# Altium PCB SIRA_Rev1.PcbDoc
Units mil, origin at the board's own origin, x right, y up, seen from the top; angles counter-clockwise.
Board outline 11445.03 x 5305.02 mil, 2 copper layers (Top Layer, Bottom Layer); 30 components, 83 nets, 179 pads, 0 vias.
Unrouted connection lines stored in the file: 2.
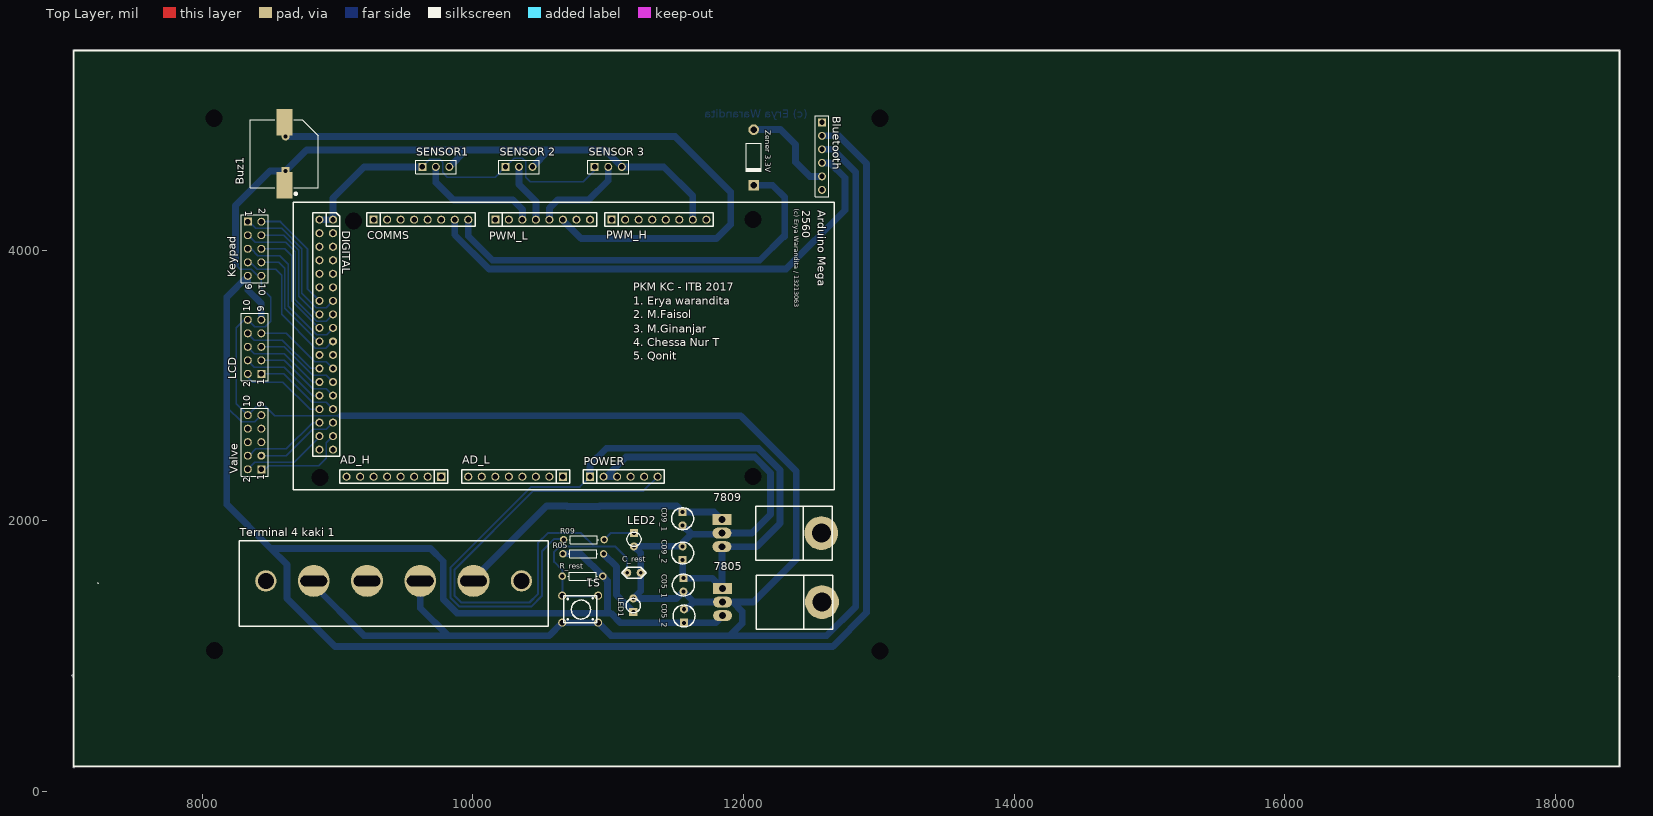
[diagram p0: Top Layer view]
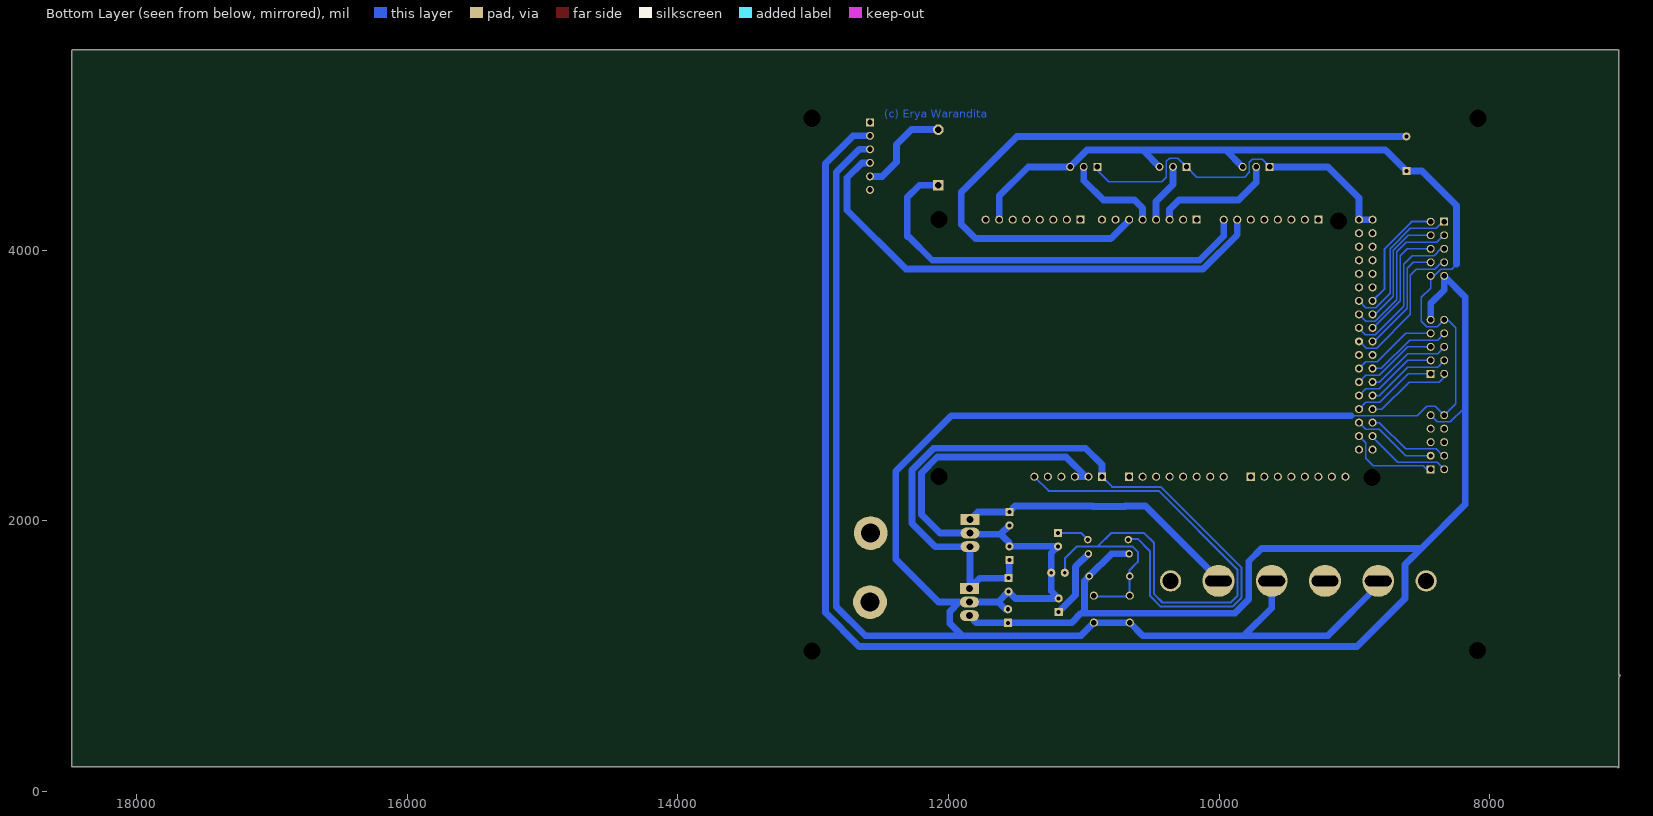
[diagram p1: Bottom Layer view, seen from below]

## Layer stack, top to bottom
Top Solder: solder mask 0.4, Solder Resist, Dk 3.5
Top Layer: signal copper 1.4
Dielectric 1: dielectric 12.6, FR-4, Dk 4.8
Bottom Layer: signal copper 1.4
Bottom Solder: solder mask 0.4, Solder Resist, Dk 3.5

## Board outline
7041.45,846.45 ccw(c7045,850) 7044.98,844.99 7044.98,180 ccw(c7050,180) 7053.56,176.47 7053.55,176.45 7057.08,179.99 18475,179.99 ccw(c18475,185) 18480.01,185 18480.01,5475 ccw(c18475,5475) 18475,5480.02 7050,5480.02 ccw(c7050,5475) 7044.98,5475 7044.98,857.11 7043.55,858.55 ccw(c7040,855) 7036.45,851.45

## Design rules (kind name [scope] priority, off if disabled: settings)
Clearance [All] p1: gap=15
PolygonConnect [All] p1: connectstyle=Relief reliefconductorwidth=10 reliefentries=4 polygonreliefangle="90 Angle" airgapwidth=10
RoomDefinition SIRA_Rev1 [InComponentClass('SIRA_Rev1')] p1: confinementstyle=ConfineIn formatcopy=TRUE lockcomponents=FALSE outline 7990,930 13155,930 13155,5090 7990,5090
RoutingVias [All] p1: holewidth=28 width=50 viastyle="Through Hole" minholewidth=28 minwidth=50 maxholewidth=28 maxwidth=50
SolderMaskExpansion [All] p1: expansion=4
Width [All] p1: maxlimit=50 minlimit=10 preferedwidth=15
30 further rules are at their usual default settings.

## Classes and differential pairs
component class SIRA_Rev1: 7805 7809 AD_H AD_L Buz1 C05_1 C05_2 C09_1 C09_2 C_rest COMMS DIGITAL Keypad LCD LED1 LED2 POWER PWM_H PWM_L R05 R09 R_rest S1 SENSOR1 "SENSOR 2" "SENSOR 3" "Terminal 4 kaki 1" Valve

## Components (designator, comment, footprint, x,y, rotation, side; value= is the part's Value field where it differs from the comment)
7805 "78XX/79XX" 78XX/79XX 12085,1880 r0 top
7809 "78XX/79XX" 78XX/79XX 12080,2390 r0 top
AD_H "AD_H" "Header 8x1 8.5mm" 9765,2325 r180 top
AD_L "AD_L" "Header 8x1 8.5mm" 10665,2325 r180 top
Bluetooth "Comment" HDR1X6 12580,4945 r270 top
Buz1 "Buzzer" ABSM-1574 8605,4480 r90 top
C05_1 "cap 1uF/50V" "cap 1uF/50V" 11555,1875 r270 top
C05_2 "cap 1uF/50V" "cap 1uF/50V" 11560,945 r90 top
C09_1 "cap 1uF/50V" "cap 1uF/50V" 11550,2365 r270 top
C09_2 "cap 1uF/50V" "cap 1uF/50V" 11550,1410 r90 top
C_rest "cap 22/33uF" "cap 22/33uF" 11540,1615 r180 top
COMMS "Communication" "Header 8x1 8.5mm" 9265,4225 r0 top
DIGITAL "IO_36" "HEADER 36X 8MM" 8965,4225 r270 top
Keypad "Header 5X2" HDR2X5#1 8335,4210 r270 top
LCD "Header 5X2" HDR2X5#1 8435,3085 r90 top
LED1 "LED kecil" "LED kecil" 11085,1425 r90 top
LED2 "LED kecil" "LED kecil" 11290,1810 r270 top
POWER "POWER" "Header 6x1 8.5mm" 10865,2325 r0 top
PWM_H "PWM_H" "Header 8x1 8.5mm" 11025,4225 r0 top
PWM_L "PWM_L" "Header 8x1 8.5mm" 10165,4225 r0 top
R05 "Res1" AXIAL-0.3 10815,1755 r180 top
R09 "Res1" AXIAL-0.3 10820,1860 r180 top
R_rest "Res1" AXIAL-0.3 10810,1590 r0 top
S1 "pushbutton" pushbutton 10360,1345 r180 top
SENSOR1 "Header 3" HDR1X3 9625,4615 r0 top
"SENSOR 2" "Header 3" HDR1X3 10240,4615 r0 top
"SENSOR 3" "Header 3" HDR1X3 10900,4615 r0 top
"Terminal 4 kaki 1" "Terminal Blok 4 kaki Besar" "TERMINAL 4 KAKI" 10555,1850 r180 top
Valve "Header 5X2" HDR2X5#2 8435,2380 r90 top
"Zener 3.3V" "Comment" DO-41 12075,4685 r270 top

## Footprints (in the part's own frame and the unit in brackets; to place one, negate y for a bottom-side part, rotate by r counter-clockwise, add the part's x,y. Pads: shape width x height; smd on the part's side, far side on the other; paste and mask are expansions set on the pad)
78XX/79XX [mil]
  round 250 hole 140: 0(495,-482)
  rect 140x80 hole 50: 1(-240,-382)
  oval 140x80 hole 50: 2(-240,-482) 3(-240,-582)
  silkscreen extent 10,-682 575,-282
ABSM-1574 [mm] "Magnetic Transducer Buzzer"
  rect 5x3 smd: 1(0,0) 2(11.8,0)
  rect 1.5x1.5 hole 0.7: 1A(2.65,-0.24)
  round 1.5 hole 0.7: 2A(9.15,-0.24)
  silkscreen extent -1.83,-6.4 12.3,6.4
AXIAL-0.3 [mm] "Axial Device, Thru-Hole; 2 Leads; 0.3 in Pin Spacing"
  round 1.4 hole 0.85: 1(-3.81,0) 2(3.81,0)
  silkscreen extent -2.77,-0.76 2.77,0.76
"cap 1uF/50V" [mil]
  rect 60x60 hole 30: 1(300,0)
  round 60 hole 30: 2(400,0)
  silkscreen extent 269,-81 432,81
"cap 22/33uF" [mil]
  round 60 hole 28: 1(300,0) 2(400,0)
  silkscreen extent 260,-40 440,40
DO-41 [mm] "Diode, Axial; Body 5.2 x 2.7 mm (LxDia. max), Lead Dia. 0.86 mm (max)"
  round 2 hole 1.2: 1(-5.23,0)
  rect 2x2 hole 1.2: 2(5.23,0)
  silkscreen extent -2.65,-1.4 2.75,1.4
HDR1X3 [mm] "Connector; Header; 3 Position"
  rect 1.5x1.5 hole 1.016: 1(0,0)
  round 1.5 hole 1.016: 2(2.54,0) 3(5.08,0)
  silkscreen extent -1.27,-1.27 6.35,1.27
HDR1X6 [mm] "Connector; Header; 6 Position"
  rect 1.5x1.5 hole 1.016: 1(0,0)
  round 1.5 hole 1.016: 2(2.54,0) 3(5.08,0) 4(7.62,0) 5(10.16,0) 6(12.7,0)
  silkscreen extent -1.27,-1.27 13.97,1.27
HDR2X5#1 [mm] "Connector; Header; 5x2 Position"
  rect 1.5x1.5 hole 1.016: 1(0,0)
  round 1.5 hole 1.016: 2(0,2.54) 3(2.54,0) 4(2.54,2.54) 5(5.08,0) 6(5.08,2.54) 7(7.62,0) 8(7.62,2.54) 9(10.16,0) 10(10.16,2.54)
  silkscreen extent -1.27,-1.27 11.43,3.81
HDR2X5#2 [mm] "Connector; Header; 5x2 Position"
  rect 1.5x1.5 hole 1.016: 1(0,0)
  round 1.5 hole 1.016: 2(0,2.54) 4(2.54,2.54) 5(5.08,0) 6(5.08,2.54) 7(7.62,0) 8(7.62,2.54) 9(10.16,0) 10(10.16,2.54)
  round 1.5 hole 0.9: 3(2.54,0)
  silkscreen extent -1.27,-1.27 11.43,3.81
"Header 6x1 8.5mm" [mil] "Stackable 6 pin header"
  rect 60x60 hole 40: 1(0,0)
  round 60 hole 40: 2(100,0) 3(200,0) 4(300,0) 5(400,0) 6(500,0)
  silkscreen extent -50,-50 550,50, body extent -50,-50 550,50, height 335
"Header 8x1 8.5mm" [mil] "Stackable 8 pin header"
  rect 60x60 hole 40: 1(0,0)
  round 60 hole 40: 2(100,0) 3(200,0) 4(300,0) 5(400,0) 6(500,0) 7(600,0) 8(700,0)
  silkscreen extent -50,-50 750,50, body extent -50,-50 750,50, height 335
"HEADER 36X 8MM" [mil] "Stackable 10 pin header"
  round 60 hole 40: 1(0,0) 2(0,-100) 3(100,0) 4(100,-100) 5(200,0) 6(200,-100) 7(300,0) 8(300,-100) 9(400,0) 10(400,-100) 11(500,0) 12(500,-100) 13(600,0) 14(600,-100) 15(700,0) 16(700,-100) 17(800,0) 18(800,-100) 19(900,-100) 21(1000,0) 22(1000,-100) 23(1100,0) 24(1100,-100) 25(1200,0) 26(1200,-100) 27(1300,0) 28(1300,-100) 29(1400,0) 30(1400,-100) 31(1500,0) 32(1500,-100) 33(1600,0) 34(1600,-100) 35(1700,0) 36(1700,-100)
  round 60 hole 30: 20(900,0)
  silkscreen extent -50,-150 1750,50, body extent -50,-150 1750,50, height 335
"LED kecil" [mil]
  rect 60x60 hole 30: 1(-100,-100)
  round 60 hole 30: 2(0,-100)
  silkscreen extent -106,-153 0,-47
pushbutton [mil]
  round 60 hole 40: 1(-565,-101) 1(-300,-101) 2(-565,99) 2(-300,99)
  silkscreen extent -555,-101 -310,99
"TERMINAL 4 KAKI" [mm] "TERMINAL HITAM 4 KAKI"
  round 6 hole 2 slot 5 at 0 deg: 1(14,7.5) 2(24,7.5) 3(34,7.5) 4(44,7.5)
  round 4 hole 3: " "(5,7.5) " "(53,7.5)
  silkscreen extent 0,0 58,16

## Part data
7805 7809: library part 7805/7809/7812/7905/7909/7912
Buz1: "Magnetic Transducer Buzzer"
Keypad LCD Valve: "Header, 5-Pin, Dual row"
R05 R09 R_rest: "Resistor"
SENSOR1 "SENSOR 2" "SENSOR 3": "Header, 3-Pin"
"Terminal 4 kaki 1": library part "Terminal Blok 4 kaki"

## Free pads (board coordinates)
  round 62.99 hole 125.98: 0(8085,4975) 0(8090,1040) 0(8870,2320) 0(9115,4215) 0(12070,2325) 0(12070,4225) 0(13010,1035) 0(13010,4975)

## Nets (pads, with @x,y where several pads share a name; then routed paths per layer and width w, separated by ;. In a path a pad name is that pad's centre, name@x,y a point inside that pad or via, vN(x,y) a via of type N, cw(c..) or ccw(c..) an arc to the next point about the centre after c; other vN are vias at no path point)
3V3: POWER.5
5V: "SENSOR 2.1" "SENSOR 3.1" DIGITAL.1 DIGITAL.2 SENSOR1.1 | length 2644.2
  Bottom Layer w10: SENSOR1.1 9680,4670 9755.47,4670 9775.47,4650 9775.47,4574.53 9810,4540 10165,4540 10240,4615 10305,4680 10365,4680 10389.53,4655.47 10389.53,4540.47 10425,4505 10815,4505 10900,4590
  Bottom Layer w50: DIGITAL.2 DIGITAL.1 8965,4385 9195,4615 SENSOR1.1
AD0: AD_L.1
AD1: AD_L.2
AD2: AD_L.3
AD3: AD_L.4
AD4: AD_L.5
AD5: AD_L.6
AD6: AD_L.7
AD7: AD_L.8
AD8: AD_H.1
AD9: AD_H.2
AD10: AD_H.3
AD11: AD_H.4
AD12: AD_H.5
AD13: AD_H.6
AD14: AD_H.7
AD15: AD_H.8
AREF: PWM_H.8
GND: 7805.2 7809.2 "SENSOR 2.3" "SENSOR 3.3" "Terminal 4 kaki 1.2" "Terminal 4 kaki 1.4" Bluetooth.3 Buz1.1 Buz1.1A C05_1.2 C05_2.2 C09_1.2 C09_2.2 C_rest.1 Keypad.10 LCD.10 LED1.2 LED2.2 POWER.2 POWER.3 PWM_H.7 S1.2 SENSOR1.3 Valve.10 | length 24725.2
  Bottom Layer w10: 8245,3895 8280,3860 8360,3860 8410,3810 Keypad.10 8435,3720 8505,3650 8505,3475 8465,3435 8385,3435 LCD.10 8310,3485 8250,3425 8250,2865 Valve.10 8400,2845 8465,2845 8530,2780 8530,2775 9025,2775 ; C09_2.2 C09_2.2@11550,1835 ; C05_2.2 C05_2.2@11579,1345 ; 7809.2@11832,1900 7809.2 ; 7805.2 11922,1398
  Bottom Layer w50: 8245,3895 8245,4330 8499.33,4584.33 Buz1.1A 8770.12,4740 9950,4740 ; 8822.72,1554.72 8822.72,1522.28 9195,1150 9815,1150 ; 9025,2775 11980,2775 12390,2365 12390,1715 12073,1398 11922,1398 11990,1330 11990,1240 11900,1150 ; 9610.12,1554.72 9610.12,1354.88 9815,1150 ; SENSOR1.3 9950,4740 ; 10440,4615 10560,4735 10560,4740 ; POWER.2 POWER.2@10985,2325 ; POWER.3 POWER.2@10985,2325 ; C09_2.2 LED2.2 11240,1760 C_rest.1 11240,1480 LED1.2 11505,1425 C05_1.2 11632,1398 ; C09_2.2@11550,1835 11615,1900 ; C09_1.2 11615,1900 ; C05_2.2@11579,1345 11632,1398 ; PWM_H.7 11625,4400 11410,4615 11100,4615 10975,4740 10560,4740 ; 7809.2@11832,1900 11615,1900 ; 7809.2 12063,1908 12200,2045 12200,2353.08 12083.08,2470 11130,2470 POWER.2@10985,2325 ; 7805.2 11632,1398 ; Bluetooth.3 12660,4745 12830,4575 12830,1365 12615,1150 11900,1150 ; 9815,1150 10564,1150 10660,1246 10925,1246 11021,1150 11900,1150 ; 9950,4740 10560,4740
IO22: DIGITAL.3
IO23: DIGITAL.4
IO24: DIGITAL.5
IO25: DIGITAL.6
IO26: DIGITAL.7
IO27: DIGITAL.8
IO28: DIGITAL.9
IO29: DIGITAL.10
IO30: DIGITAL.11
IO31: DIGITAL.12
IO32: DIGITAL.13 Keypad.1 | length 1107
  Bottom Layer w10: Keypad.1@8345,4210 8395,4160 8585,4160 8735,4010 8735,3680 8840,3575 8915,3575 DIGITAL.13
  Bottom Layer w15: Keypad.1 Keypad.1@8345,4210
IO33: DIGITAL.14 Keypad.2 | length 845.1
  Bottom Layer w15: Keypad.2 8575,4210 8775,4010 8775,3715 DIGITAL.14
IO34: DIGITAL.15 Keypad.3 | length 1121.7
  Bottom Layer w10: Keypad.3 8340,4110 8390,4060 8614.29,4060 8685,3989.29 8685,3634.29 8844.29,3475 8915,3475 DIGITAL.15
IO35: DIGITAL.16 Keypad.4 | length 871.5
  Bottom Layer w10: Keypad.4 8599.64,4110 8710,3999.64 8710,3659.64 8844.64,3525 DIGITAL.16
IO36: DIGITAL.17 Keypad.5 | length 1098.7
  Bottom Layer w10: Keypad.5 8360,4010 8410,3960 8570,3960 8635,3895 8635,3584.29 8844.29,3375 8920,3375 8965,3420 DIGITAL.17
IO37: DIGITAL.18 Keypad.6 | length 869.2
  Bottom Layer w10: Keypad.6 8610,4010 8660,3960 8660,3623.93 8858.93,3425 DIGITAL.18
IO38: DIGITAL.20 Keypad.7 | length 1083.6
  Bottom Layer w10: Keypad.7 8355,3910 8405.47,3859.53 8540.47,3859.53 8585,3815 8585,3525 8835,3275 8910,3275 8960,3325 DIGITAL.20
IO39: DIGITAL.19 Keypad.8 | length 860.7
  Bottom Layer w10: Keypad.8@8420,3910 Keypad.8 8565,3910 8610,3865 8610,3568.93 8853.93,3325 DIGITAL.19
IO40: DIGITAL.21
IO41: DIGITAL.22
IO42: DIGITAL.23 LCD.7 | length 637.7
  Bottom Layer w10: LCD.7 8620,3385 8830,3175 8915,3175 DIGITAL.23
IO43: DIGITAL.24 LCD.8 | length 637.7
  Bottom Layer w10: LCD.8 8384.53,3335.47 8589.53,3335.47 8800,3125 DIGITAL.24
IO44: DIGITAL.25 LCD.5 | length 637.7
  Bottom Layer w10: LCD.5 8604.64,3285 8789.64,3100 8790,3100 8815,3075 8915,3075 DIGITAL.25
IO45: DIGITAL.26 LCD.6 | length 637.7
  Bottom Layer w10: LCD.6 8384.53,3235.47 8604.53,3235.47 8815,3025 DIGITAL.26
IO46: DIGITAL.27 LCD.3 | length 637.7
  Bottom Layer w10: LCD.3 8605,3185 8815,2975 8915,2975 DIGITAL.27
IO47: DIGITAL.28 LCD.4 | length 637.7
  Bottom Layer w10: LCD.4 8384.53,3135.47 8604.53,3135.47 8815,2925 DIGITAL.28
IO48: DIGITAL.29 LCD.1 | length 637.7
  Bottom Layer w10: LCD.1 8600,3085 8810,2875 8915,2875 DIGITAL.29
IO49: DIGITAL.30 LCD.2 | length 652.3
  Bottom Layer w10: LCD.2 8335,3060 8370,3025 8595,3025 8795,2825 DIGITAL.30
IO50: DIGITAL.31 Valve.3 | length 631.5
  Bottom Layer w10: Valve.3 8620,2480 8815,2675 8915,2675 DIGITAL.31
IO51: DIGITAL.32 Valve.4 | length 631.5
  Bottom Layer w10: Valve.4 8345,2480 8395,2530 8620,2530 8815,2725 DIGITAL.32
IO52: DIGITAL.33 Valve.1 | length 698.8
  Bottom Layer w10: Valve.1 8465,2380 8490,2405 8860,2405 8915,2460 8915,2575 DIGITAL.33
IO53: DIGITAL.34 Valve.2 | length 637.3
  Bottom Layer w10: Valve.2 8385,2430 8680,2430 8865,2615 DIGITAL.34
MISO: 
MOSI: 
NetLED1_1: LED1.1 R05.1 | length 521.1
  Bottom Layer w50: R05.1 11060,1660 11060,1450 LED1.1
NetLED2_1: LED2.1 R09.1 | length 240.7
  Bottom Layer w15: R09.1 11020,1910 LED2.1
PWM2: PWM_L.3 SENSOR1.2 | length 912.8
  Bottom Layer w50: SENSOR1.2 9725,4500 9855,4370 10295,4370 10365,4300 PWM_L.3
PWM3: "SENSOR 2.2" PWM_L.4 | length 441.8
  Bottom Layer w50: 10340,4615 10340,4485 10465,4360 PWM_L.4
PWM4: "SENSOR 3.2" PWM_L.5 | length 704.9
  Bottom Layer w50: PWM_L.5 10565,4310 10625,4370 10855,4370 11000,4515 11000,4615
PWM5: Buz1.2 Buz1.2A PWM_L.6 | length 5044.9
  Bottom Layer w50: Buz1.2A 11494.76,4840.24 11905,4430 11905,4190 11800,4085 10800,4085 10665,4220 PWM_L.6
PWM6: PWM_L.7
PWM7: PWM_L.8
PWM8: PWM_H.1
PWM9: PWM_H.2
PWM10: PWM_H.3
PWM11: PWM_H.4
PWM12: PWM_H.5
PWM13: PWM_H.6
RESET: C_rest.2 POWER.6 R_rest.1 S1.1 | length 4851.1
  Bottom Layer w15: S1.1@10940,1461 10925,1441 10660,1441 10660,1446 R_rest.1 10660,1635 10600,1695 10600,1770 10639.94,1809.94 10690.74,1809.94 10690.79,1810 10895,1810 ; C_rest.2 11140,1720 11050.06,1809.94 10895.06,1809.94 10895,1810 ; POWER.6 11260,2220 10445,2220 9863.21,1638.21 9863.21,1444.22 9912.43,1395 10417.57,1395 10480,1457.43 10480,1835 10555.06,1910.06 10794.94,1910.06 10895,1810
RX0: PWM_L.1
RX1: COMMS.3
RX2: COMMS.5
RX3: Bluetooth.4 COMMS.7 | length 3737.5
  Bottom Layer w50: COMMS.7 9865,4113.08 10118.08,3860 12315,3860 12750,4295 12750,4535 12640,4645 Bluetooth.4
SCK: 
SCL: COMMS.1
SDA: COMMS.2
TX0: PWM_L.2
TX1: COMMS.4
TX2: COMMS.6
TX3: "Zener 3.3V.1" "Zener 3.3V.2" Bluetooth.5 COMMS.8 | length 3888.4
  Bottom Layer w50: COMMS.8 9965,4105 10145,3925 12120,3925 12295,4100 12305,4100 12305,4390 12215.91,4479.09 12075,4479.09 ; 12075,4890.91 12274.09,4890.91 12385,4780 12385,4650 12490,4545 Bluetooth.5
VBAT+: 7809.1 "Terminal 4 kaki 1.1" "Terminal 4 kaki 1.3" C09_1.1 | length 2116.8
  Bottom Layer w50: 10003.82,1554.72 10003.82,1568.82 10542.56,2107.56 10692.98,2107.56 10695.54,2105 10934.46,2105 10937.02,2107.56 11507.44,2107.56 C09_1.1 11783,2065 7809.1
VCC: 7805.3 Bluetooth.2 C05_2.1 Keypad.9 LCD.9 R05.2 R_rest.2 Valve.9 | length 15972.6
  Bottom Layer w10: 8180,2835 8185,2835 8290,2730 8385,2730 Valve.9
  Bottom Layer w50: LCD.9 8435,3605 8335,3705 Keypad.9 8180,3655 8180,2835 8180,2120 8505,1795 ; R05.2 10795,1755 R_rest.2 10995,1555 10995,1340 ; 7805.3 11792,1245 C05_2.1 11090,1245 11019,1316 9881.82,1316 9785.71,1412.12 9785.71,1414.29 9780,1420 9780,1700 9685,1795 8505,1795 ; Bluetooth.2 12705,4845 12910,4640 12910,1320 12660,1070 8980,1070 8625,1425 8625,1675 8505,1795
VIN: 7805.1 7809.3 C05_1.1 C09_2.1 POWER.1 R09.2 | length 6069.6
  Bottom Layer w10: 7805.1@11840,1503 7805.1
  Bottom Layer w15: R09.2 10665,1865 10600,1865 10510,1775 10510,1445 10430,1365 9900,1365 9833.21,1431.79 9833.21,1653.21 10430,2250 10790,2250 POWER.1
  Bottom Layer w50: POWER.1 10865,2415 10985,2535 12110,2535 12270,2375 12270,1980 12098,1808 7809.3 11840,1503 11768,1575 C05_1.1 11550,1580 C09_2.1
pads on no net: 7805.0 7809.0 "Terminal 4 kaki 1. " Bluetooth.1 Bluetooth.6 DIGITAL.35 DIGITAL.36 POWER.4 Valve.5 Valve.6 Valve.7 Valve.8

## Other copper
Bottom Layer:
  text "(c) Erya Warandita" at 12475,4980 h60

## Silkscreen, mask and mechanical layers (free items; w line width, h text height)
Top Overlay:
  lines w10: 7225,1540 7230,1535 ; 18470,850 18475,845 ; 7050,180 7055,185 18475,185 18475,5475 7060,5475 7050,5475 7050,180 ; 8670,2230 12570,2230 12670,2230 12670,4355 8670,4355 8670,2230
  text "(c) Erya Warandita / 13213063" at 12360,4305 h60 r270
  text "2560" at 12435,4295 h60 r270
  text "Arduino Mega" at 12550,4295 h60 r270
  text "PKM KC - ITB 2017" at 11185,3700 h60
  text "1. Erya warandita" at 11185,3595 h60
  text "2. M.Faisol" at 11185,3495 h60
  text "3. M.Ginanjar" at 11185,3390 h60
  text "4. Chessa Nur T" at 11185,3290 h60
  text "5. Qonit" at 11185,3190 h60
Mechanical 1:
  circle w5: c12070,2325 r62.99
  circle w5: c12070,4225 r62.99

## Text inside footprints (layer, text, board x,y; h text height)
Keypad: Top Overlay "10" at 8415,3750 h50 r270; Top Overlay "9" at 8315,3750 h50 r270; Top Overlay "1" at 8315,4290 h50 r270; Top Overlay "2" at 8415,4310 h50 r270
LCD: Top Overlay "10" at 8355,3545 h50 r90; Top Overlay "9" at 8455,3545 h50 r90; Top Overlay "1" at 8455,3005 h50 r90; Top Overlay "2" at 8355,2985 h50 r90
Valve: Top Overlay "10" at 8355,2840 h50 r90; Top Overlay "9" at 8455,2840 h50 r90; Top Overlay "1" at 8455,2300 h50 r90; Top Overlay "2" at 8355,2280 h50 r90